# EAGLE board dimmerWall (EAGLE 7.5.0)
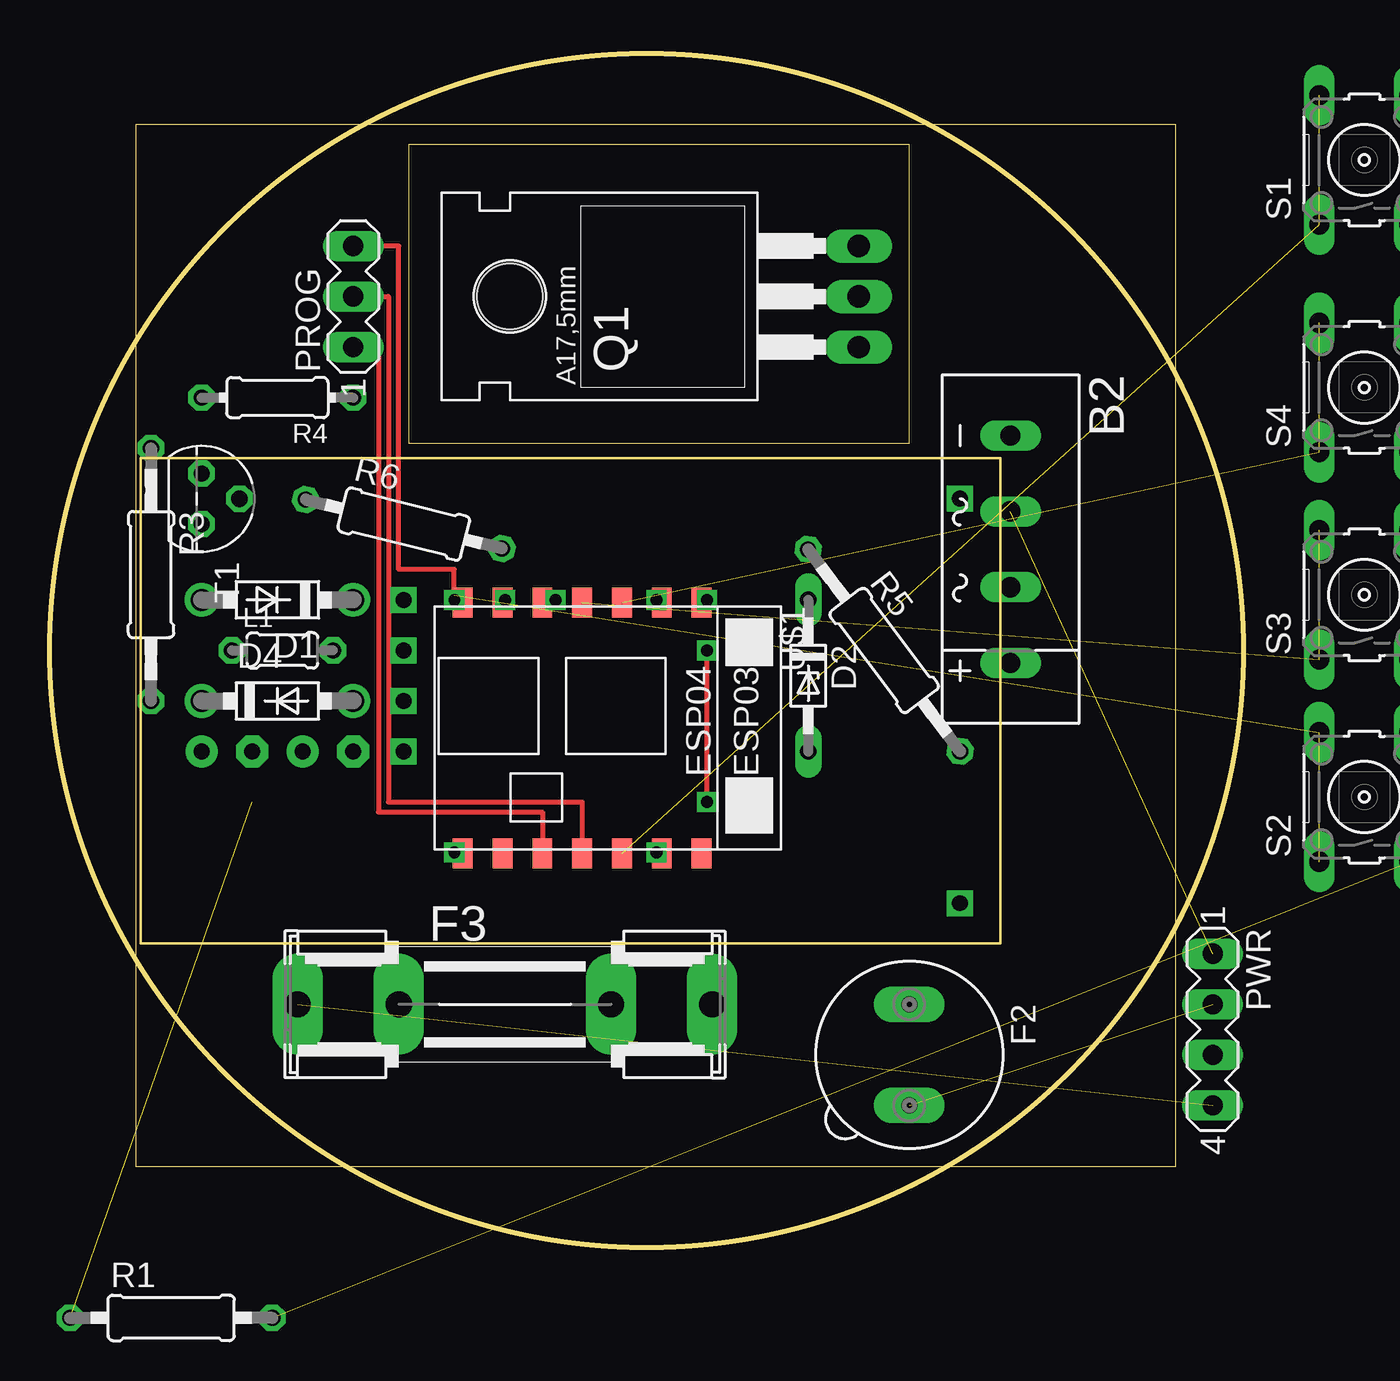
[diagram p0: board, top side]
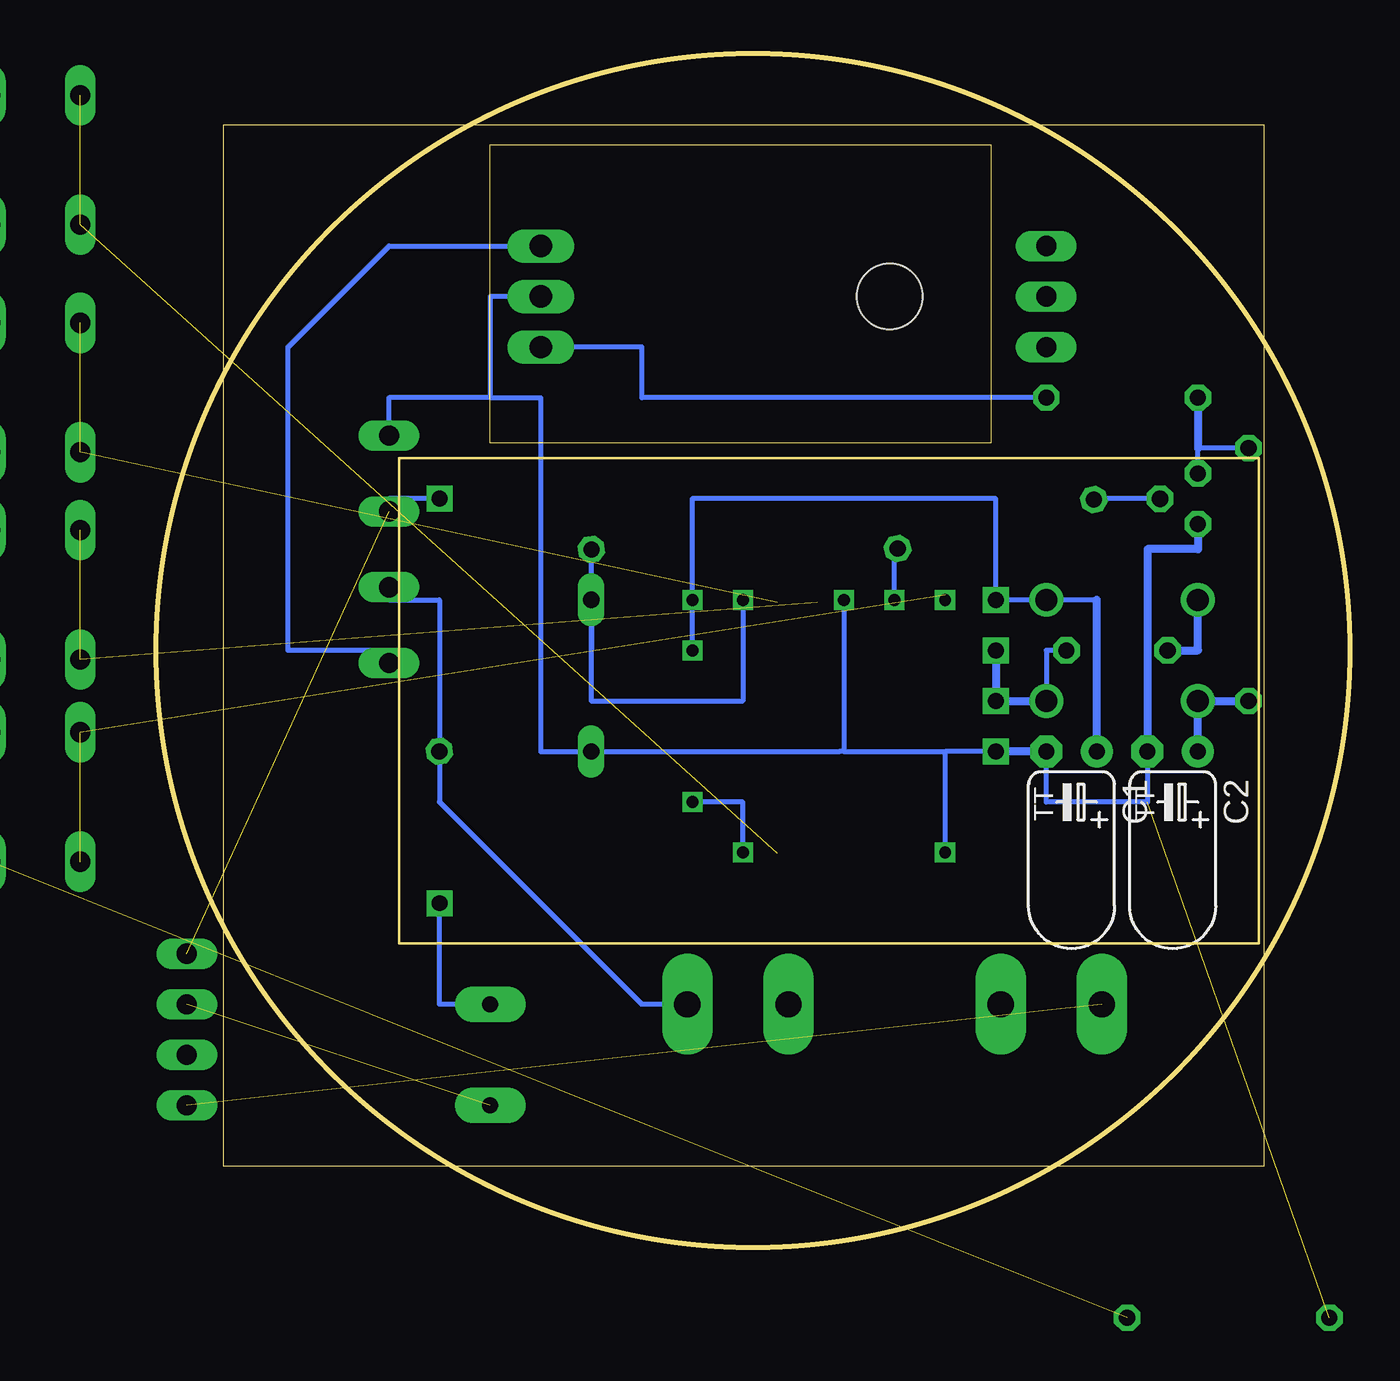
[diagram p1: board, bottom side, seen from below]

Size 59.95 x 59.95 mm. Coordinates in mm from the lower left corner, seen from the top.
Outline: 4.32,4.07 56.57,4.07 56.57,56.38 4.32,56.38 4.32,4.07
Outline: circle at 29.98,29.98 radius 29.98
Copper layers (1*16): Top 0.035mm / dielectric 1.5mm / Bottom 0.035mm
Design rules "default": minimum track width 10mil, minimum drill 24mil, track to track 8mil, track to pad 8mil, pad to pad 8mil, via to via 8mil, smd to smd 8mil, copper to edge 40mil, drill to drill 8mil, minimum pad ring 10mil, minimum via ring 8mil, stop-mask expansion 4mil, vias tented up to drill 0mil, thermal gap 10mil

## Footprints (pad centres in the part's own frame; a part is rotated, then mirrored left to right if it is on the bottom)
2KBP = drill 1.016 long: + 5.715,0; - -5.715,0; AC1 -1.905,0; AC2 1.905,0
TT2D4L = drill 0.813 pad 1.6: + -1.27,0 | drill 0.813 pad 1.6 octagon: - 1.27,0
DO41-7.6 = drill 1.1 pad 1.7: A 3.81,0; C -3.81,0
DO34Z7 = drill 0.813 long: A 3.81,0; C -3.81,0
19560 = drill 0.813 pad 1.778 long: 1 -2.54,0; 2 2.54,0
SHK20L = drill 1.321 pad 2.54 long: 1A -10.414,0; 1B -5.334,0; 2A 10.414,0; 2B 5.334,0
0204/5 = drill 0.813 octagon: 1 -2.54,0; 2 2.54,0
MA03-1 = drill 1.016 long: 1 -2.54,0; 2 0,0; 3 2.54,0
MA04-1 = drill 1.016 long: 1 -3.81,0; 2 -1.27,0; 3 1.27,0; 4 3.81,0
TO220 = drill 1.118 long: 1 -2.54,-6.35; 2 0,-6.35; 3 2.54,-6.35 | hole 3.302: 0,11.176
0207/10 = drill 0.813 octagon: 1 -5.08,0; 2 5.08,0
0207/12 = drill 0.813 octagon: 1 -6.35,0; 2 6.35,0
0204/7 = drill 0.813 octagon: 1 -3.81,0; 2 3.81,0
B3F-10XX = drill 1.016 long: 1 -3.251,2.261; 2 3.251,2.261; 3 -3.251,-2.261; 4 3.251,-2.261
TO92 = drill 0.813 octagon: 1 1.27,0; 2 0,1.905; 3 -1.27,0
ESP-03 = smd 1.5 x 1: ANT 7.4,4.8; CH_PD 7.4,2.8; GND 7.4,-7.2; GPIO0 -5.2,-7.2; GPIO2 -5.2,-5.2; GPIO12 -5.2,0.8; GPIO13 -5.2,-1.2; GPIO14 -5.2,2.8; GPIO15 -5.2,-3.2; GPIO18 7.4,0.8; NC 7.4,-5.2; URXD 7.4,-1.2; UTXD 7.4,-3.2; VCC -5.2,4.8
SMPS = drill 0.8 square: FB 7.62,-5.08; GND 7.62,2.54; L -20.32,10.16; N -20.32,-10.16; VPP1 7.62,0; VPP2 7.62,-2.54

## Placement (x,y rotation side)
B2  [2KBP]  48.26,35.06 270 top
C1  10u/16  [TT2D4L]  13.97,24.9 180 bottom
C2  10u/16  [TT2D4L]  8.89,24.9 180 bottom
D1  1N5817-B  [DO41-7.6]  11.43,32.52 180 top
D2  2V7  [DO34Z7]  38.1,28.71 270 top
D4  1N4148  [DO41-7.6]  11.43,27.44 0 top
F2  160m flink  [19560]  43.18,9.66 270 top
F3  1A flink  [SHK20L]  22.86,12.2 0 top
L1  330n  [0204/5]  11.69,29.98 0 top
PROG  [MA03-1]  15.24,47.76 90 top
PWR  [MA04-1]  58.42,10.93 270 top
Q1  IRF840  [TO220]  34.29,47.76 90 top
R1  470  [0207/10]  6.1,-3.55 0 top  (outside the outline)
R3  51k  [0207/12]  5.08,33.79 270 top
R4  51k  [0204/7]  11.43,42.68 180 top
R5  1M8  [0207/12]  41.91,29.98 307 top
R6  51k  [0207/10]  17.78,36.33 346 top
S1  [B3F-10XX]  66.04,54.61 90 top  (outside the outline)
S2  [B3F-10XX]  66.04,22.61 90 top  (outside the outline)
S3  [B3F-10XX]  66.04,32.77 90 top  (outside the outline)
S4  [B3F-10XX]  66.04,43.18 90 top  (outside the outline)
T1  BC547  [TO92]  7.62,37.6 270 top
U$1  ESP8266  [ESP-03]  27.94,27.18 270 top
U$2  SMPS  [SMPS]  25.4,27.44 180 top

## Library data of the parts
B2 = rectifier
C1 C2 L1 R1 R3-R6 = rcl
D1 D2 D4 = diode
F2 = fuse; MPN: 56000001009; OC_FARNELL: 1185363; OC_NEWARK: 15P8392
F3 = fuse; OC_FARNELL: unknown; OC_NEWARK: unknown
PROG PWR = con-lstb; OC_FARNELL: unknown; OC_NEWARK: unknown
Q1 = transistor-fet
S1-S4 = switch-omron; MPN: B3F-1000; OC_FARNELL: 176432; OC_NEWARK: 36M3542
T1 = transistor
U$1 = esp8266modules
U$2 = smps

## Nets
+3V3: C1.+ D1.C U$1.CH_PD U$1.VCC U$2.FB
+5V: C2.+ D4.C R3.2
GND: B2.- C1.- C2.- D2.A Q1.2 R1.1 T1.1 U$1.GND U$1.GPIO15 U$2.GND
N$1: Q1.1 R4.1
N$2: R3.1 R4.2 T1.3
N$3: D1.A L1.1
N$4: B2.AC1 PWR.1 U$2.N
N$5: R6.1 T1.2
N$6: D4.A L1.2 U$2.VPP1 U$2.VPP2
N$7: D2.C R5.1 U$1.GPIO14
N$8: F2.2 PWR.2
N$9: F2.1 U$2.L
N$10: R6.2 U$1.GPIO2
N$11: PROG.1 U$1.UTXD
N$12: PROG.2 U$1.URXD
N$13: PROG.3 S2.1 S2.2 U$1.GPIO0
N$14: S3.1 S3.2 U$1.GPIO13
N$15: S1.1 S1.2 U$1.GPIO18
N$16: S4.1 S4.2 U$1.GPIO12
N$17: B2.AC2 F3.2A R5.2
N$18: R1.2 S1.3 S1.4 S2.3 S2.4 S3.3 S3.4 S4.3 S4.4
N$21: B2.+ Q1.3
N$31: F3.1A PWR.4

## Tracks (layer width: path | path; a pad name or v marks a point on that pad's centre or on a via)
+3V3  (via drill 0.6, 0.6 pad 0.25)
  Top 0.254: U$1.VCC 32.77,32.38 v33.02,32.52 | U$1.CH_PD 30.74,19.82 v30.48,19.82 | v33.02,22.36 v33.02,29.98
  Bottom 0.254: 12.7,32.52 D1.C U$2.FB 17.78,37.6 33.02,37.6 v33.02,32.52 v33.02,29.98 | v30.48,19.82 30.48,22.36 v33.02,22.36
  Bottom 0.406: C1.+ 12.7,32.52
+5V
  Bottom 0.406: R3.2 D4.C C2.+
GND  (via drill 0.6, 0.6 pad 0.25)  (1 unrouted)
  Top 0.254: U$1.GND 20.58,20.04 v20.32,19.82 | U$1.GPIO15 24.74,32.52 v25.4,32.52
  Bottom 0.254: Q1.2 43.18,47.76 43.18,42.68 | 43.18,42.68 48.26,42.68 B2.- | 25.4,24.9 20.32,24.9 | 43.18,42.68 40.64,42.68 40.64,24.9 D2.A 25.66,24.9 25.4,24.9 | v20.32,19.82 20.32,24.9 | U$2.GND 20.32,24.9 | C2.- 10.16,22.36 15.24,22.36 C1.- | v25.4,32.52 25.4,24.9
  Bottom 0.406: C1.- U$2.GND | T1.1 7.62,35.06 10.16,35.06 C2.-
N$1
  Bottom 0.254: R4.1 35.56,42.68 35.56,45.22 Q1.1
N$2
  Bottom 0.254: R3.1 7.62,40.14 T1.3
  Bottom 0.406: R4.2 7.62,40.14
N$3
  Bottom 0.406: L1.1 7.62,29.98 D1.A
N$4  (1 unrouted)
  Bottom 0.254: U$2.N 48.26,37.6 B2.AC1
N$5
  Bottom 0.254: T1.2 12.7,37.6 R6.1
N$6
  Bottom 0.254: L1.2 15.24,29.98 D4.A
  Bottom 0.406: U$2.VPP2 U$2.VPP1 D4.A
N$7  (via drill 0.6 pad 0.25)
  Top 0.254: U$1.GPIO14 v30.48,32.52
  Bottom 0.254: R5.1 38.09,29.98 D2.C 38.1,27.44 30.48,27.44 v30.48,32.52
N$8  (1 unrouted)
N$9
  Bottom 0.254: F2.1 45.72,12.2 U$2.L
N$10  (via drill 0.6)
  Top 0.254: U$1.GPIO2 22.86,32.38 v22.86,32.52
  Bottom 0.254: v22.86,32.52 22.86,35.1 R6.2
N$11
  Top 0.254: PROG.1 16.51,45.22 16.51,21.85 24.74,21.85 U$1.UTXD
N$12
  Top 0.254: PROG.2 17.02,47.76 17.02,22.36 26.74,22.36 U$1.URXD
N$13  (via drill 0.6)  (2 unrouted)
  Top 0.254: PROG.3 17.53,50.3 17.53,34.04 20.32,34.04 v20.32,32.52 20.32,32.38 U$1.GPIO0
  Bottom 0.254: v20.32,32.52 20.32,32.77
N$14  (2 unrouted)
N$15  (2 unrouted)
N$16  (2 unrouted)
N$17
  Bottom 0.254: B2.AC2 48.26,32.52 45.72,32.52 45.72,22.37 | F3.2A 35.56,12.2 45.72,22.36 45.72,22.37 | R5.2 45.72,22.37
N$18  (8 unrouted)
N$21
  Bottom 0.254: B2.+ 48.26,29.98 53.34,29.98 53.34,45.22 48.26,50.3 Q1.3
N$31  (1 unrouted)